# Altium PCB activator.PcbDoc
Units mm, origin at the board's own origin, x right, y up, seen from the top; angles counter-clockwise.
Board outline 100 x 60 mm, 4 copper layers (Top, PWR, GND, Bottom), stack 0.778 mm thick; 59 components, 35 nets, 223 pads, 42 vias.
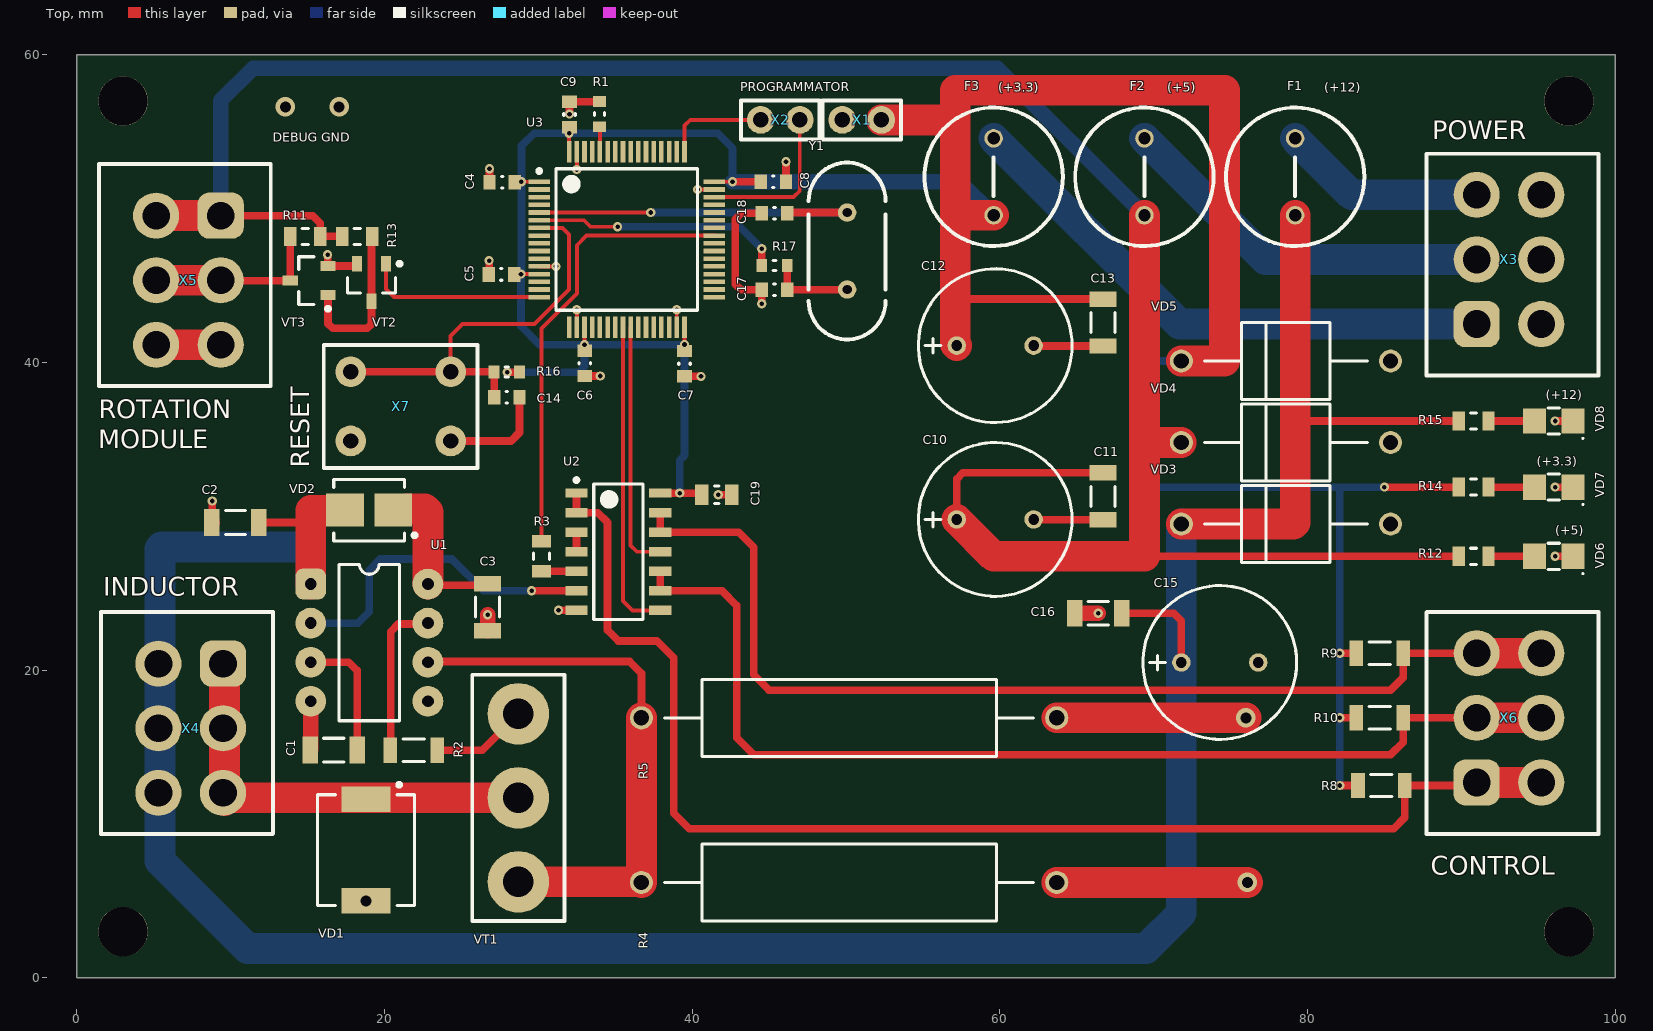
[diagram p0: Top view]
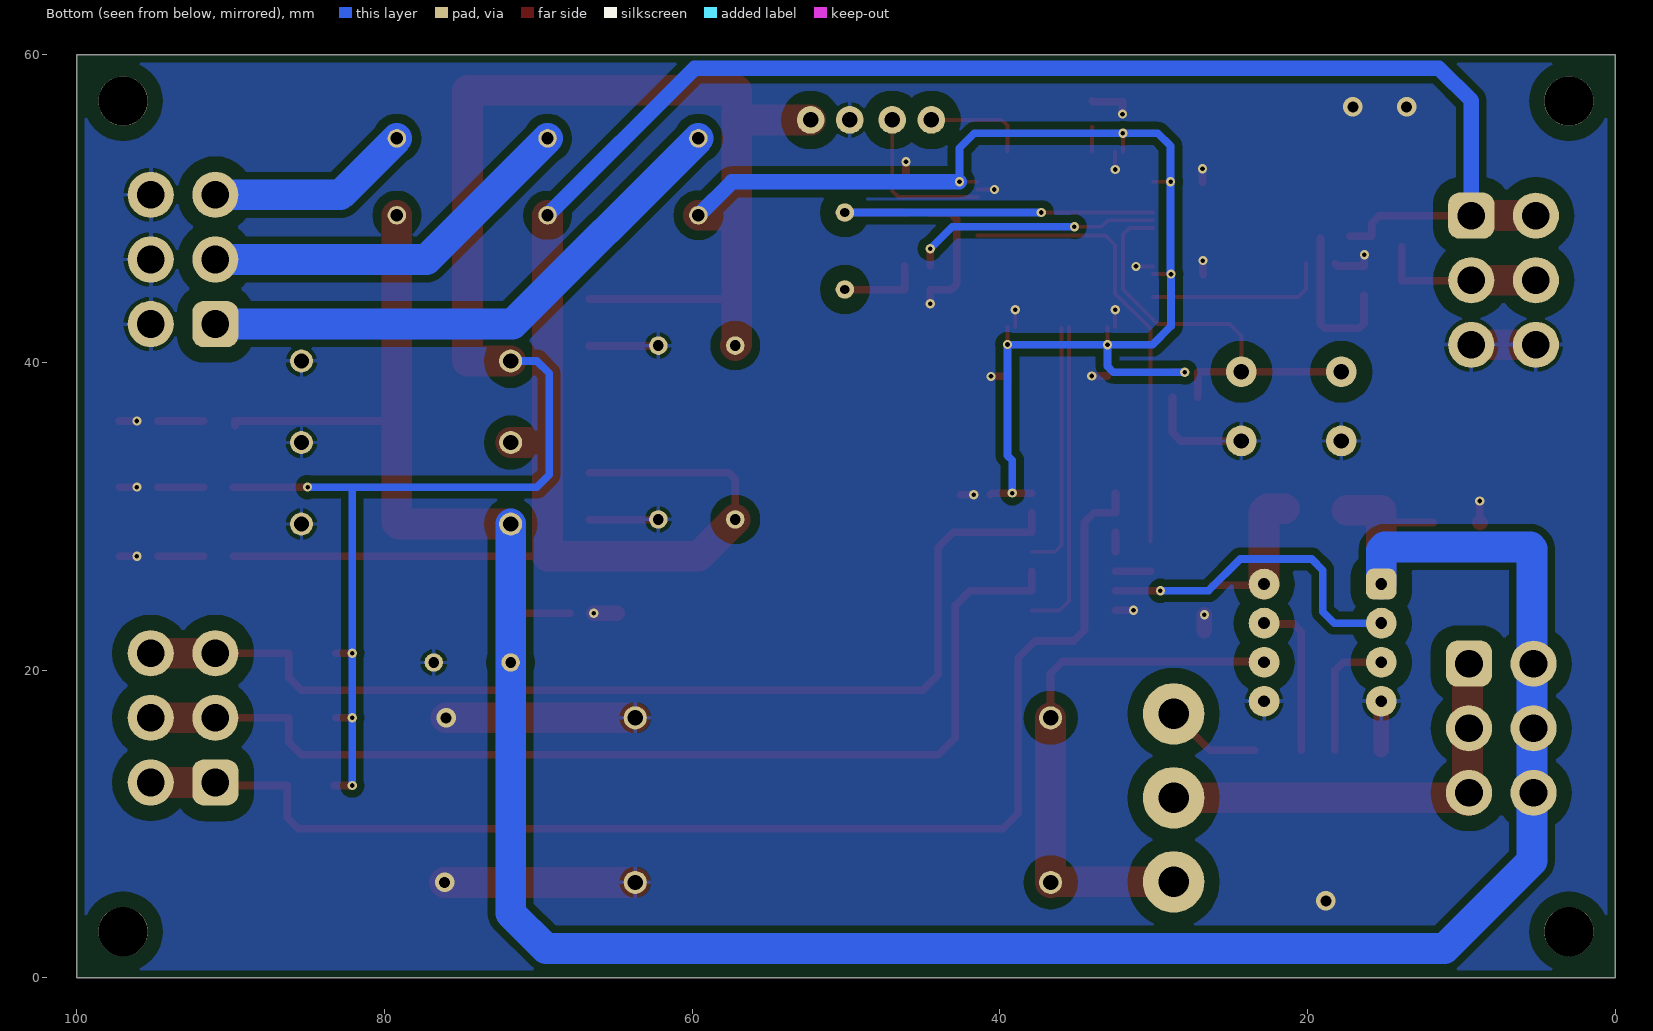
[diagram p1: Bottom view, seen from below]
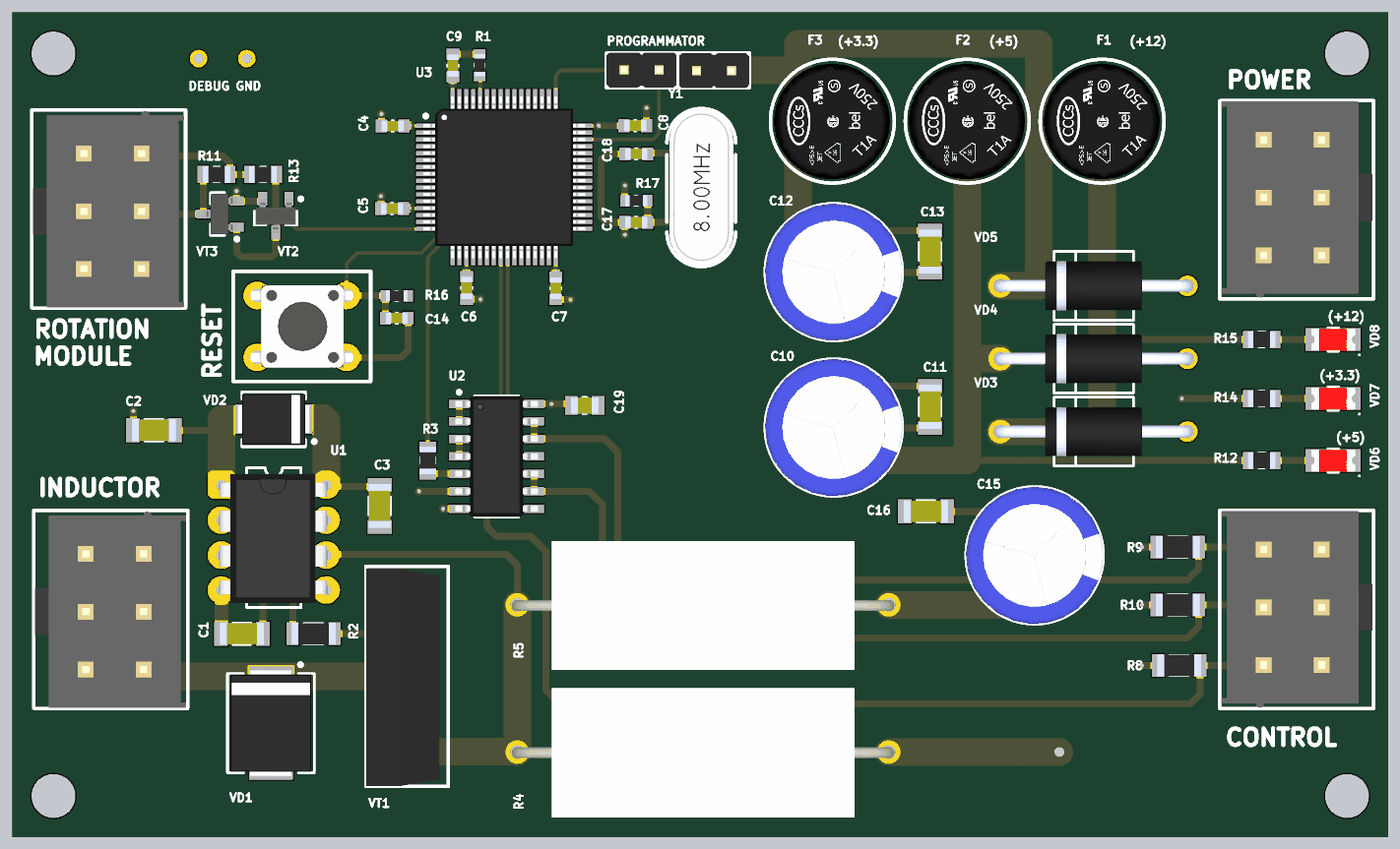
[diagram p2: 3D render of the assembled board from above, using the file's embedded part models]

## Layer stack, top to bottom
Top Solder: solder mask 0.0102, Solder Resist, Dk 3.5
Top: signal copper 0.0356
Dielectric 1: core 0.254, FR-4, Dk 4.2
PWR: signal copper 0.036
Dielectric 3: prepreg 0.127, Dk 4.2
GND: signal copper 0.036
Dielectric 2: core 0.254, Dk 4.2
Bottom: signal copper 0.0356
Bottom Solder: solder mask 0.0102, Solder Resist, Dk 3.5

## Board outline
0,0 100,0 100,60 0,60

## Design rules (kind name [scope] priority, off if disabled: settings)
Clearance [All] p1: gap=0.15 ignorepadtopadclearanceinfootprint=TRUE except(0.5: Track-Poly Via-Poly; 1: SMDPad-Poly THPad-Poly)
DiffPairsRouting [All] p1: maxlimit=0.254 minlimit=0.15 mostfreqgap=0.254 toplayer_minwidth=0.15 toplayer_maxwidth=0.381 toplayer_prefwidth=0.254 midlayer1_minwidth=0.15 midlayer1_maxwidth=0.381 midlayer1_prefwidth=0.254 midlayer2_minwidth=0.15 midlayer2_maxwidth=0.381 midlayer2_prefwidth=0.254 bottomlayer_minwidth=0.15 bottomlayer_maxwidth=0.381 bottomlayer_prefwidth=0.254 maxuncoupledlength=12.7
PolygonConnect [All] p1: thpad.connectstyle=Relief thpad.reliefconductorwidth=0.254 thpad.reliefentries=4 thpad.polygonreliefangle="90 Angle" thpad.airgapwidth=0.254 smdpad.connectstyle=Relief smdpad.reliefconductorwidth=0.254 smdpad.reliefentries=4 smdpad.polygonreliefangle="90 Angle" smdpad.airgapwidth=0.254 via.connectstyle=Direct via.reliefconductorwidth=0.254 via.reliefentries=4 via.polygonreliefangle="90 Angle" via.airgapwidth=0.254
RoutingVias [All] p1: holewidth=0.711 width=1.27 viastyle="Through Hole" minholewidth=0.711 minwidth=1.27 maxholewidth=0.711 maxwidth=1.27 useviatemplates=TRUE viatemplateguid#1={D7D14B3E-164A-456C-8CFF-387BE2EA7930} viatemplateguid#2={59AD5054-E988-479E-B6BC-500063E70A10} viatemplatename#1=v50h20m0mx0 viatemplatename#2=v60h30m0mx0
SolderMaskExpansion [All] p1: expansion=0.102
Width [All] p1: maxlimit=2 minlimit=0.254 preferedwidth=1 toplayer_prefwidth=0.5 midlayer1_maxwidth=1 midlayer1_prefwidth=0.5 midlayer2_maxwidth=1 midlayer2_prefwidth=0.5 bottomlayer_minwidth=0.5 minimp=50.000000 maximp=50.000000 favimp=50.000000
29 further rules are at their usual default settings.

## Components (designator, comment, footprint, x,y, rotation, side; value= is the part's Value field where it differs from the comment)
C1 "270 pF" CAPC3216X05N 16.7,14.8 r180 top
C2 "0.1" CAPC3216X05N 10.3,29.6 r0 top
C3 "0.1" CAPC3216X05N 26.7,24.1 r90 top
C4 "0.1" CAPC1608X05N 27.65,51.725 r0 top
C5 "0.1" CAPC1608X05N 27.6,45.725 r0 top
C6 "0.1" CAPC1608X05N 33.025,39.95 r90 top
C7 "0.1" CAPC1608X05N 39.5,39.925 r90 top
C8 "0.1" CAPC1608X05N 45.275,51.75 r180 top
C9 "0.1" CAPC1608X05N 32.025,56.125 r270 top
C10 "1000.0x16v" C-LOW-ESR-10-12.5 57.2,29.8 r0 top
C11 "0.1x50v" CAPC3216X05N 66.7,31.3 r270 top
C12 "1000.0x16v" C-LOW-ESR-10-12.5 57.2,41.1 r0 top
C13 "0.1x50v" CAPC3216X05N 66.7,42.6 r270 top
C14 "0.1" CAPC1608X05N 27.95,37.75 r0 top
C15 "1000.0x16v" C-LOW-ESR-10-12.5 71.8,20.5 r0 top
C16 "0.1x50v" CAPC3216X05N 66.4,23.7 r180 top
C17 "12pF" CAPC1608X05N 45.35,44.725 r0 top
C18 "12pF" CAPC1608X05N 45.35,49.7 r0 top
C19 "0.1" CAPC2012X04N 41.6,31.4 r180 top
F1 "RFS-6.3A" MRT-FUSE 79.2,52.1 r90 top
F2 "RFS-1.25A" MRT-FUSE 69.4,52.1 r90 top
F3 "RFS-0.8A" MRT-FUSE 59.6,52.1 r90 top
R1 "330" RESC1608X05N 33.975,56.15 r270 top
R2 "330" RESC3216X05N 21.9,14.8 r180 top
R3 "330" RESC2012X04N 30.2,27.4 r90 top
R4 "0.43" SQP-5W 63.7,6.2 r180 top
R5 "0.43" SQP-5W 63.7,16.9 r180 top
R8 "1k" RESC3216X05N 84.8,12.5 r180 top
R9 "1k" RESC3216X05N 84.7,21.1 r180 top
R10 "1k" RESC3216X05N 84.7,16.9 r180 top
R11 "1k" RESC2012X04N 14.85,48.2 r0 top
R12 "1k" RESC2012X04N 90.8,27.4 r180 top
R13 "1k" RESC2012X04N 18.225,48.2 r180 top
R14 "1k" RESC2012X04N 90.8,31.9 r180 top
R15 "5.6k" RESC2012X04N 90.8,36.2 r180 top
R16 "3k" RESC1608X05N 27.95,39.375 r180 top
R17 "2.2k" RESC1608X05N 45.35,46.3 r180 top
U1 "IR2121PBF" DIP8 15.2,25.6 r0 top
U2 "74AHC00D.112" SOIC127P600X175-14N 35.2,27.7 r0 top locked
U3 "STM32F072RBT6" TSQFP50P1200X1200X160-64N 35.75,48 r0 top
VD1 "SS34" DIOM6959X26N 18.8,8.3 r270 top
VD2 "SS26" DIOM4336X21N 19,30.4 r180 top
VD3 "P6KE27CA" P6KE27CA 85.4,29.5 r180 top
VD4 "P6KE6.8CA-LF" P6KE27CA 85.4,34.8 r180 top
VD5 "P6KE6.8CA-LF" P6KE27CA 85.4,40.1 r180 top
VD6 "FYLS-1206UGC (+5 ON)" CAPMP3216X11N 96,27.4 r180 top
VD7 "FYLS-1206UEC (+3.3 ON)" CAPMP3216X11N 96,31.9 r180 top
VD8 "FYLS-1206URC (+12 ON)" CAPMP3216X11N 96,36.2 r180 top
VT1 "IRG4PH30KPBF" TO-247AC 28.7,11.7 r270 top
VT2 "PDTC114ET.215" SOT95P238X102-3N 19.15,45.225 r270 top
VT3 "PDTC114ET.215" SOT95P238X102-3N 15.125,45.325 r180 top
X1 "Jamper ZL201" ZL201-2 51.025,55.775 r0 top
X2 "Jamper ZL201" ZL201-2 45.725,55.775 r180 top
X3 "POWER" MINI-FIT-6WAY-SM 93.1,46.7 r270 top
X4 "INDUCTOR" MINI-FIT-6WAY-SM 7.4,16.225 r90 top
X5 "ROTATION-MODULE" MINI-FIT-6WAY-SM 7.25,45.35 r90 top locked
X6 "CONTROL" MINI-FIT-6WAY-SM 93.1,16.9 r270 top
X7 "RESET" "TACT SWITCH" 21.05,37.15 r0 top
Y1 "8MHz" HC49LT 50.075,44.75 r90 top

## Footprints (in the part's own frame and the unit in brackets; to place one, negate y for a bottom-side part, rotate by r counter-clockwise, add the part's x,y. Pads: shape width x height; smd on the part's side, far side on the other; paste and mask are expansions set on the pad)
C-LOW-ESR-10-12.5 [mm]
  round 1.2 hole 0.7: 1(0,0) 2(5,0)
  silkscreen extent -2.5,-5 7.5,5, body extent -2.5,-5 7.5,5, height 12.1
CAPC1608X05N [mm] "Chip Capacitor, 2-Leads, Body 1,60x0,80mm, IPC Medium Density"
  rect 0.8x0.95 smd: 1(-0.825,0) 2(0.825,0)
  silkscreen extent -0.05,-0.38 0.05,0.38, body extent -0.8,-0.4 0.8,0.4, height 0.9
CAPC2012X04N [mm] "Chip Capacitor, 2-Leads, Body 2,00x1,20mm, IPC Medium Density"
  rect 0.9x1.35 smd: 1(-0.975,0) 2(0.975,0)
  silkscreen extent -0.15,-0.58 0.15,0.58, body extent -1,-0.6 1,0.6, height 0.9
CAPC3216X05N [mm] "Chip Capacitor, 2-Leads, Body 3,20x1,60mm, IPC Medium Density"
  rect 1x1.75 smd: 1(-1.525,0) 2(1.525,0)
  silkscreen extent -0.65,-0.77 0.65,0.77, body extent -1.6,-0.8 1.6,0.8, height 1.3
CAPMP3216X11N [mm] "Molded Capacitor, 2-Leads, Body 3,20x1,60mm, IPC Medium Density"
  rect 1.5x1.65 smd: 1(-1.25,0) 2(1.25,0)
  silkscreen extent -1.95,-0.85 0.38,1.17, body extent -1.6,-0.8 1.6,0.8, height 1.1
DIOM4336X21N [mm] "Molded Diode, 2-Leads, Body 4,31x3,62mm, IPC Medium Density"
  rect 2.45x2.15 smd: 1(-1.575,0) 2(1.575,0)
  silkscreen extent -3.08,-2 2.3,2, body extent -2.65,-1.85 2.65,1.85, height 2.2
DIOM6959X26N [mm] "Molded Diode, 2-Leads, Body 6,85x5,90mm, IPC Medium Density"
  rect 1.65x3.2 smd: 1(-3.3,0) 2(3.3,0)
  silkscreen extent -4.37,-3.15 3.6,3.15, body extent -3.9,-2.95 3.9,2.95, height 2.4
DIP8 [mm]
  rrect50% 2x2 hole 0.762: 1(0,0)
  round 2 hole 0.762: 2(0,-2.54) 3(0,-5.08) 4(0,-7.62) 5(7.62,-7.62) 6(7.62,-5.08) 7(7.62,-2.54) 8(7.62,0)
  silkscreen extent 1.84,-8.89 5.78,1.27, body extent -0.19,-8.57 7.69,0.83, height 4.36
HC49LT [mm]
  round 1.2 hole 0.6: 1(0,0) 2(5,0)
  silkscreen extent -3.25,-2.5 8.25,2.5, body extent -3.15,-2.33 8.2,2.32, height 3.6
MINI-FIT-6WAY-SM [mm]
  rrect50% 3x3 hole 1.8: 1(4.2,-2.1)
  round 3 hole 1.8: 2(0,-2.1) 3(-4.2,-2.1) 4(4.2,2.1) 5(0,2.1) 6(-4.2,2.1)
  silkscreen extent -6.88,-5.35 7.55,5.82, body extent -6.82,-5.25 7.47,5.75, height 12.8
MRT-FUSE [mm]
  round 1.2 hole 0.8: 1(-2.525,0) 2(2.475,0)
  silkscreen extent -4.52,-4.5 4.47,4.5, body extent -4.27,-4.2 4.18,4.25, height 7.4
P6KE27CA [mm]
  round 1.5 hole 1: A(0,0) K(13.6,0)
  silkscreen extent 1.5,-2.5 12.1,2.5, body extent -0.41,-1.78 14.05,1.78, height 4.78
RESC1608X05N [mm] "Chip Resistor, 2-Leads, Body 1,60x0,80mm, IPC Medium Density"
  rect 0.7x0.85 smd: 1(-0.825,0) 2(0.825,0)
  silkscreen extent -0.1,-0.33 0.1,0.33, body extent -0.8,-0.4 0.8,0.4, height 0.5
RESC2012X04N [mm] "Chip Resistor, 2-Leads, Body 2,00x1,20mm, IPC Medium Density"
  rect 0.8x1.25 smd: 1(-0.975,0) 2(0.975,0)
  silkscreen extent -0.2,-0.53 0.2,0.53, body extent -1,-0.6 1,0.6, height 0.5
RESC3216X05N [mm] "Chip Resistor, 2-Leads, Body 3,20x1,60mm, IPC Medium Density"
  rect 0.9x1.65 smd: 1(-1.525,0) 2(1.525,0)
  silkscreen extent -0.7,-0.72 0.7,0.72, body extent -1.6,-0.8 1.6,0.8, height 0.6
SOIC127P600X175-14N [mm] "SOIC, 14-Leads, Body 8,65x3,90mm, Pitch 1,27mm, IPC Medium Density"
  rect 1.45x0.6 smd: 1(-2.725,3.81) 2(-2.725,2.54) 3(-2.725,1.27) 4(-2.725,0) 5(-2.725,-1.27) 6(-2.725,-2.54) 7(-2.725,-3.81) 8(2.725,-3.81) 9(2.725,-2.54) 10(2.725,-1.27) 11(2.725,0) 12(2.725,1.27) 13(2.725,2.54) 14(2.725,3.81)
  silkscreen extent -2.85,-4.4 1.6,4.78, body extent -3,-4.4 3,4.4, height 1.7
SOT95P238X102-3N [mm] "SOT23, 3-Leads, Body 2,93x2,38mm, Pitch 0,95mm, IPC Medium Density"
  rect 1x0.65 smd: 1(-1.2,0.95) 2(-1.2,-0.95) 3(1.25,0)
  silkscreen extent -1.32,-1.55 0.7,1.95, body extent -1.2,-1.46 1.28,1.46, height 0.99
SQP-5W [mm]
  round 1.5 hole 1: 1(0,0) 2(27,0)
  silkscreen extent 1.5,-2.5 25.5,2.5, body extent -0.4,-4.65 27.4,4.75, height 9.4
"TACT SWITCH" [mm]
  round 2 hole 1: 1(-3.25,2.25) 1(3.25,2.25) 2(-3.25,-2.25) 2(3.25,-2.25)
  silkscreen extent -5,-4 5,4, body extent -3.94,-3 4.04,3, height 4.9
TO-247AC [mm]
  round 4 hole 2: 1(-5.46,0) 2(0,0) 3(5.46,0)
  silkscreen extent -8,-3 8,3, body extent -7.83,-2.96 7.98,2.35, height 25
TSQFP50P1200X1200X160-64N [mm] "TSQFP, 64-Leads, Body 10,00x10,00mm, Pitch 0,50mm, IPC Medium Density"
  rect 1.4x0.3 smd: 1(-5.7,3.75) 2(-5.7,3.25) 3(-5.7,2.75) 4(-5.7,2.25) 5(-5.7,1.75) 6(-5.7,1.25) 7(-5.7,0.75) 8(-5.7,0.25) 9(-5.7,-0.25) 10(-5.7,-0.75) 11(-5.7,-1.25) 12(-5.7,-1.75) 13(-5.7,-2.25) 14(-5.7,-2.75) 15(-5.7,-3.25) 16(-5.7,-3.75) 33(5.7,-3.75) 34(5.7,-3.25) 35(5.7,-2.75) 36(5.7,-2.25) 37(5.7,-1.75) 38(5.7,-1.25) 39(5.7,-0.75) 40(5.7,-0.25) 41(5.7,0.25) 42(5.7,0.75) 43(5.7,1.25) 44(5.7,1.75) 45(5.7,2.25) 46(5.7,2.75) 47(5.7,3.25) 48(5.7,3.75)
  rect 0.3x1.4 smd: 17(-3.75,-5.7) 18(-3.25,-5.7) 19(-2.75,-5.7) 20(-2.25,-5.7) 21(-1.75,-5.7) 22(-1.25,-5.7) 23(-0.75,-5.7) 24(-0.25,-5.7) 25(0.25,-5.7) 26(0.75,-5.7) 27(1.25,-5.7) 28(1.75,-5.7) 29(2.25,-5.7) 30(2.75,-5.7) 31(3.25,-5.7) 32(3.75,-5.7) 49(3.75,5.7) 50(3.25,5.7) 51(2.75,5.7) 52(2.25,5.7) 53(1.75,5.7) 54(1.25,5.7) 55(0.75,5.7) 56(0.25,5.7) 57(-0.25,5.7) 58(-0.75,5.7) 59(-1.25,5.7) 60(-1.75,5.7) 61(-2.25,5.7) 62(-2.75,5.7) 63(-3.25,5.7) 64(-3.75,5.7)
  silkscreen extent -5.82,-4.6 4.6,4.6, body extent -5.89,-5.89 5.89,5.89, height 1.57
ZL201-2 [mm]
  round 1.8 hole 1: 1(-1.27,0) 2(1.27,0)
  silkscreen extent -2.54,-1.27 2.54,1.27, body extent -2.56,-1.3 2.52,1.24, height 8.54

## Part data
C1 C2 C3 C4 C5 C6 C7 C8 C9 C11 C13 C14 C16 C17 C18 C19: library part C, "SMD конденсатор", Ref=http://www.kosmodrom.com.ua/prodlist.php?name=cap1206
C10 C12 C15: library part C-LOW-ESR-RADIAL, "Выводной электролит"
F1 F2 F3: library part FUSE, "Вставка плавкая", Ref=http://www.kosmodrom.com.ua/el.php?name=RFT-2.5A
R1 R2 R3 R8 R9 R10 R11 R12 R13 R14 R15 R16 R17: library part R, "SMD резистор", Ref=http://www.kosmodrom.com.ua/prodlist.php?name=res1206
R4 R5: library part R5W, "Резистор керамика 5 ватт", Ref=https://voron.ua/catalog/001676
U1: "IGBT-MOSFET DRIVER"
U2: "2И-НЕ 4 ВЕНТИЛЯ"
U3: "Микроконтроллер"
VD1: "Диод Шоттки", Ref=http://www.kosmodrom.com.ua/prodlist.php?page=0&name=SS34&okbutton=%CF%EE%E8%F1%EA+%EF%EE+%F1%EA%EB%E0%E4%F3
VD2: "диод Шоттки"
VD3: "Cупрессор", Ref=https://prom.ua/p207053054-p6ke27ca;all.html
VD4 VD5: library part P6KE27CA, "Cупрессор", Ref=https://prom.ua/p207053054-p6ke27ca;all.html
VD6 VD7 VD8: library part FYLS-1206, "Светодиод", Ref=http://www.kosmodrom.com.ua/prodlist.php?page=0&name=FYLS-1206&okbutton=%CF%EE%E8%F1%EA+%EF%EE+%F1%EA%EB%E0%E4%F3
VT1: "IGBT transistor"
VT2 VT3: "NPN transistor with bias circuit"
X3 X4 X5 X6: library part MINI-FIT-6-WAY-M
X7: library part "TACT SWITCH"
Y1: library part CERAMIC-RESONATOR, "Кварцевый резонатор", Ref (6MHz)=http://www.kosmodrom.com.ua/el.php?name=KX-13%206.0%20MHz, Ref( 8MHz)=http://www.kosmodrom.com.ua/el.php?name=KX-13-8.0-MHz

## Free pads (board coordinates)
  round 3.2 hole 3.2 unplated: M(3,3) M(3,57) M(97,3) M(97,57)

## Via types
v1: diameter 0.6/0.6/0.6/0.6 (per signal layer), hole 0.3, Top to Bottom, tented both sides, 37 vias
v2: diameter 1.27, hole 0.711, Top to Bottom, 2 vias
v3: diameter 1.27, hole 0.711, Top to Bottom, tented both sides, 2 vias
v4: diameter 1.27, hole 0.711, Top to Bottom, tented bottom, 1 vias

## Nets (pads, with @x,y where several pads share a name; then routed paths per layer and width w, separated by ;. In a path a pad name is that pad's centre, name@x,y a point inside that pad or via, vN(x,y) a via of type N, cw(c..) or ccw(c..) an arc to the next point about the centre after c; other vN are vias at no path point)
+3.3: C4.2 C5.2 C6.2 C7.2 C8.2 C9.2 C12.1 C13.1 C19.2 F3.1 R8.2 R9.2 R10.2 R14.2 R16.1 U2.14 U3.1 U3.13 U3.19 U3.32 U3.48 U3.64 VD5.K X1.2 | length 210.6
  Top w0.254: v1(28.875,45.75) U3.13 ; v1(28.9,51.75) U3.1 ; U3.64 v1(32,54.9) ; v1(33,41.15) U3.19 ; v1(39.5,41.175) U3.32 ; U3.48 v1(42.625,51.75)
  Top w0.5: v1(27.975,39.375) R16.1 ; U2.14 v1(39.19,31.51) 40.515,31.51 C19.2 ; v1(42.625,51.75) C8.2 ; 57.1,44.125 C13.1 ; v1(82.1,12.5) R8.2 ; v1(82.1,16.9) R10.2 ; v1(82.1,21.1) R9.2 ; v1(85,31.9) R14.2
  Top w2: X1.2 57,55.775 57.1,55.675 ; C12.1 57.1,41.2 57.1,44.125 57.1,49.575 ; F3.1 57.1,49.575 ; VD5.K 74.6,40.1 74.6,57.7 57.1,57.7 57.1,55.675 ; 57.1,49.575 57.1,55.675
  Bottom w0.5: v1(27.975,39.375) 32.625,39.375 33,39.75 v1(33,41.15) ; v1(39.19,31.51) 39.19,33.64 39.5,33.95 v1(39.5,41.175) 39.475,41.15 v1(33,41.15) ; v1(42.625,51.75) 42.625,53.925 41.65,54.9 v1(32,54.9) 29.725,54.9 28.9,54.075 v1(28.9,51.75) 28.9,45.775 v1(28.875,45.75) 28.875,42.35 30.075,41.15 v1(33,41.15) ; VD5.K 70.1,40.1 69.3,39.3 69.3,32.7 70.1,31.9 82.1,31.9 ; v1(82.1,12.5) v1(82.1,16.9) v1(82.1,21.1) 82.1,31.9 ; v1(85,31.9) 82.1,31.9
  Bottom w1: v1(42.625,51.75) 57.425,51.75 F3.1
+3.3-IN: F3.2 X3.1 | length 36.4
  Bottom w2: F3.2 71.675,42.5 X3.1
+5: C10.1 C11.1 F2.1 R11.2 R12.2 R13.2 VD4.K X5.1 X5.4 | length 155.4
  Top w0.5: X5.1 15.325,49.55 15.825,49.05 R11.2 R13.2 ; C10.1 57.2,32.425 57.6,32.825 C11.1 ; 70.1,27.4 R12.2
  Top w2: X5.4 X5.1 ; C10.1 59.6,27.4 69.4,27.4 69.4,35 ; F2.1 69.4,35 ; VD4.K 69.6,34.8 69.4,35
  Bottom w1: X5.1 9.35,57.025 11.45,59.125 59.85,59.125 F2.1
+5-IN: F2.2 X3.2 | length 24.9
  Bottom w2: F2.2 77.275,46.7 X3.2
+12: C2.2 C15.1 C16.1 F1.1 R15.2 U1.1 VD2.2 VD3.K X4.4 X4.5 X4.6 | length 183.3
  Top w0.5: C2.2 14.4,29.6 15.2,30.4 ; C16.1 71.3,23.7 71.8,23.2 C15.1 C15.1@71.775,20.525 ; 79.2,36.3 79.3,36.2 89.725,36.2 R15.2@89.725,35.9
  Top w2: U1.1 15.2,30.4 VD2.2 ; VD3.K 79.1,29.5 79.2,29.6 79.2,36.3 F1.1
  Bottom w2: U1.1 15.2,27.8 15,28 5.5,28 5.4,27.9 5.4,20.425 5.4,13.5 5.4,7.6 11.1,1.9 69.5,1.9 71.8,4.2 C15.1 VD3.K
+12-IN: F1.2 X3.3 | length 13.3
  Bottom w2: F1.2 82.875,50.9 X3.3
ACTIVATOR-ENA: R8.1 U2.1 U2.2 X6.1 X6.4 | length 85
  Top w0.5: U2.1 U2.2 33.86,30.24 34.5,29.6 34.5,22.6 35.2,21.9 37.7,21.9 38.8,20.8 38.8,10.7 39.8,9.7 85.6,9.7 86.325,10.425 R8.1 90.8,12.5 X6.1
  Top w2: X6.1 X6.4
GND: C1.2 C2.1 C3.1 C4.1 C5.1 C6.1 C7.1 C8.1 C9.1 C10.2 C11.2 C12.2 C13.2 C14.2 C15.2 C16.2 C17.1 C18.1 C19.1 R1.1 R4.1 R5.1 U1.4 U1.5 U2.7 U3.12 U3.18 U3.31 U3.47 U3.63 VD1.2 VD3.A VD4.A VD5.A VD6.1 VD7.1 VD8.1 VT2.2 VT3.2 X1.1 X3.4 X3.5 X3.6 X5.3 X5.6 X7.2 | length 82.7
  Top w0.254: U3.12 v1(31.15,46.25) ; U3.18 v1(32.5,43.425) ; v1(32.5,52.55) U3.63 ; U3.31 v1(39,43.425) ; v1(40.35,51.25) U3.47
  Top w0.5: C2.1@8.8,29.625 v1(8.8,31) ; C1.2 C1.2@15.2,14.825 ; v1(16.3,47) 16.3,46.3 VT3.2 18.05,46.275 VT2.2 ; X7.2@24.3,34.9 28.225,34.9 28.775,35.45 C14.2 ; C5.1 26.8,45.75 v1(26.8,46.625) ; C4.1 v1(26.825,52.6) ; v1(31.31,23.89) U2.7 ; v1(32.025,56.15) C9.1 33.95,56.95 R1.1 R1.1@34,57 ; C6.1 v1(34.025,39.125) ; C7.1 v1(40.575,39.1) ; v1(41.7,31.4) C19.1 ; v1(44.525,43.825) C17.1 43.175,44.725 42.8,45.1 42.8,49.3 43.2,49.7 C18.1 ; C8.1 v1(46.1,53.05) ; C10.2 62.225,29.775 C11.2 ; C12.2 62.225,41.075 C13.2 ; v1(96.1,27.4) VD6.1 ; v1(96.1,31.9) VD7.1 ; v1(96.1,36.2) VD8.1
  Top w1: C2.1 C2.1@8.8,29.625 ; C1.2@15.2,14.825 U1.4 ; C3.1 v1(26.7,23.6) ; C16.2 v1(66.4,23.7)
  Top w2: X5.6 X5.3 ; R4.1 v3(76.1,6.2) ; R5.1 v3(76,16.9)
  other v2: 13.55,56.625 17.05,56.625
  other v4: 18.8,5
INDUCTOR-: VD1.1 VT1.2 X4.1 X4.2 X4.3 | length 28.2
  Top w2: X4.1@9.6,20.4 9.6,13.5 9.6,11.516 9.784,11.7 VT1.2 VT1.2@28.616,11.616
NetC1_1: C1.1 U1.3 | length 8.4
  Top w0.5: U1.3 17.68,20.52 18.225,19.975 C1.1
NetC3_2: C3.2 U1.8 VD2.1 | length 9.5
  Top w0.5: U1.8 22.895,25.525 C3.2@26.2,25.525
  Top w2: VD2.1@21.5,30.5 22.6,30.5 22.82,30.28 U1.8
NetC17_2: C17.2 R17.1 Y1.1 | length 5.5
  Top w0.5: R17.1 C17.2 50.05,44.725 Y1.1
NetR1_2: R1.2 U3.60 | length 1.6
  Top w0.254: R1.2 34,55.3 U3.60
NetR2_1: R2.1 VT1.1 | length 6.3
  Top w0.5: R2.1 26.34,14.8 VT1.1
NetR2_2: R2.2 U1.7 | length 9.7
  Top w0.5: R2.2@20.4,14.8 20.4,22.5 20.9,23 U1.7@22.2,23
NetR3_1: R3.1 U2.5 | length 2.3
  Top w0.5: R3.1 30.205,26.43 U2.5
NetR3_2: R3.2 U3.41 | length 29.4
  Top w0.254: R3.2 30.2,42.2 32.5,44.5 32.5,47.625 33.125,48.25 34.909,48.25 34.911,48.248 41.448,48.248 U3.41
NetR4_2: R4.2 R5.2 U1.6 VT1.3 | length 35.8
  Top w0.5: U1.6 22.86,20.56 35.94,20.56 36.7,19.8 R5.2
  Top w2: VT1.3 36.66,6.24 R4.2 R5.2
NetR12_1: R12.1 VD6.2 | length 3
  Top w0.5: R12.1 VD6.2
NetR13_1: R13.1 VT2.3 VT3.1 | length 10.5
  Top w0.5: VT3.1 16.325,42.525 16.625,42.225 18.875,42.225 19.15,42.5 VT2.3 R13.1@19.15,48.075
NetR14_1: R14.1 VD7.2 | length 3
  Top w0.5: R14.1 VD7.2
NetR15_1: R15.1 VD8.2 | length 3
  Top w0.5: R15.1 VD8.2
NetU1_2: U1.2 U2.6 | length 21.4
  Top w0.5: v1(29.56,25.16) U2.6
  Bottom w0.5: U1.2 18.26,23.06 19,23.8 19,26.5 19.725,27.225 24.375,27.225 26.44,25.16 v1(29.56,25.16)
NetU2_3: U2.3 U2.4 | length 1.3
  Top w0.5: U2.4 U2.3
NetU2_8: U2.8 U3.24 | length 20.5
  Top w0.254: U3.24 35.5,24.5 36.11,23.89 U2.8
NetU2_11: U2.11 U3.25 | length 16.2
  Top w0.254: U3.25@36,42.25 36,28.1 36.4,27.7 U2.11
NetU3_46: U3.46 X2.1 | length 10.3
  Top w0.254: U3.46 46.6,50.75 46.995,51.145 X2.1
NetU3_49: U3.49 X2.2 | length 6.8
  Top w0.254: U3.49 39.5,55.4 39.875,55.775 X2.2
OSC-IN: C18.2 U3.5 Y1.2 | length 23.9
  Top w0.254: U3.5 v1(37.3,49.75)
  Top w0.5: C18.2 46.225,49.75 Y1.2
  Bottom w0.5: v1(37.3,49.75) Y1.2
OSC-OUT: R17.2 U3.6 | length 16.3
  Top w0.254: U3.6 32.975,49.25 33.4,48.825 v1(35.15,48.825)
  Top w0.5: R17.2 v1(44.525,47.4)
  Bottom w0.5: v1(35.15,48.825) 43.1,48.825 v1(44.525,47.4)
RESET: C14.1 R16.2 U3.7 X7.1 | length 27.9
  Top w0.254: X7.1@24.3,39.4 24.3,41.725 25.075,42.5 29.75,42.5 32,44.75 32,48.325 31.575,48.75 U3.7
  Top w0.5: X7.1@17.8,39.4 24.3,39.4 27.1,39.4 R16.2 C14.1
RM-POS1: R10.1 U2.9 U2.10 X6.2 X6.5 | length 69.9
  Top w0.5: U2.10 U2.9 41.94,25.16 42.9,24.2 42.9,15.6 44,14.5 85.4,14.5 86.225,15.325 R10.1 X6.2
  Top w2: X6.2 X6.5
RM-POS2: R9.1 U2.12 U2.13 X6.3 X6.6 | length 69.6
  Top w0.5: U2.13 U2.12 43.03,28.97 44,28 44,19.7 45,18.7 85.4,18.7 86.225,19.525 R9.1 X6.3
  Top w2: X6.3 X6.6
RM-PULSE: R11.1 VT3.3 X5.2 X5.5 | length 10.9
  Top w0.5: X5.2 9.375,45.325 VT3.3 13.875,47.525
  Top w2: X5.5 X5.2
RM-PULSE-IN: U3.16 VT2.1 | length 11.8
  Top w0.254: VT2.1 20.1,44.775 20.625,44.25 U3.16
pads on no net: U3.2 U3.3 U3.4 U3.8 U3.9 U3.10 U3.11 U3.14 U3.15 U3.17 U3.20 U3.21 U3.22 U3.23 U3.26 U3.27 U3.28 U3.29 U3.30 U3.33 U3.34 U3.35 U3.36 U3.37 U3.38 U3.39 U3.40 U3.42 U3.43 U3.44 U3.45 U3.50 U3.51 U3.52 U3.53 U3.54 U3.55 U3.56 U3.57 U3.58 U3.59 U3.61 U3.62

## Polygon pours and split planes (outlines as drawn)
GND on Bottom "Top-No Net" (solid, remove dead copper, pour order 1): 0.5,58 2,59.5 98,59.5 99.5,58 99.5,2 98,0.5 1.5,0.5 0.5,1.5

## Silkscreen, mask and mechanical layers (free items; w line width, h text height)
Top Overlay:
  text "PROGRAMMATOR" at 43.125,57.625 h0.6
  text "(+3.3)" at 59.9,57.6 h0.6
  text "(+5)" at 70.9,57.6 h0.6
  text "(+12)" at 81.1,57.6 h0.6
  text "POWER" at 88.1,54.5 h1.2
  text "DEBUG GND" at 12.725,54.35 h0.6
  text "(+12)" at 95.5,37.6 h0.6
  text "ROTATION" at 1.425,36.375 h1.2
  text "MODULE" at 1.4,34.425 h1.2
  text "(+3.3)" at 94.9,33.3 h0.6
  text "RESET" at 15.1,33.15 h1.2 r90
  text "(+5)" at 96.1,28.8 h0.6
  text "INDUCTOR" at 1.725,24.85 h1.2
  text "CONTROL" at 88,6.7 h1.2
Board:
  the board outline again, w0.5